# EAGLE board RasPiTimePowerSW_WithSTTS751 (EAGLE 7.7.0)
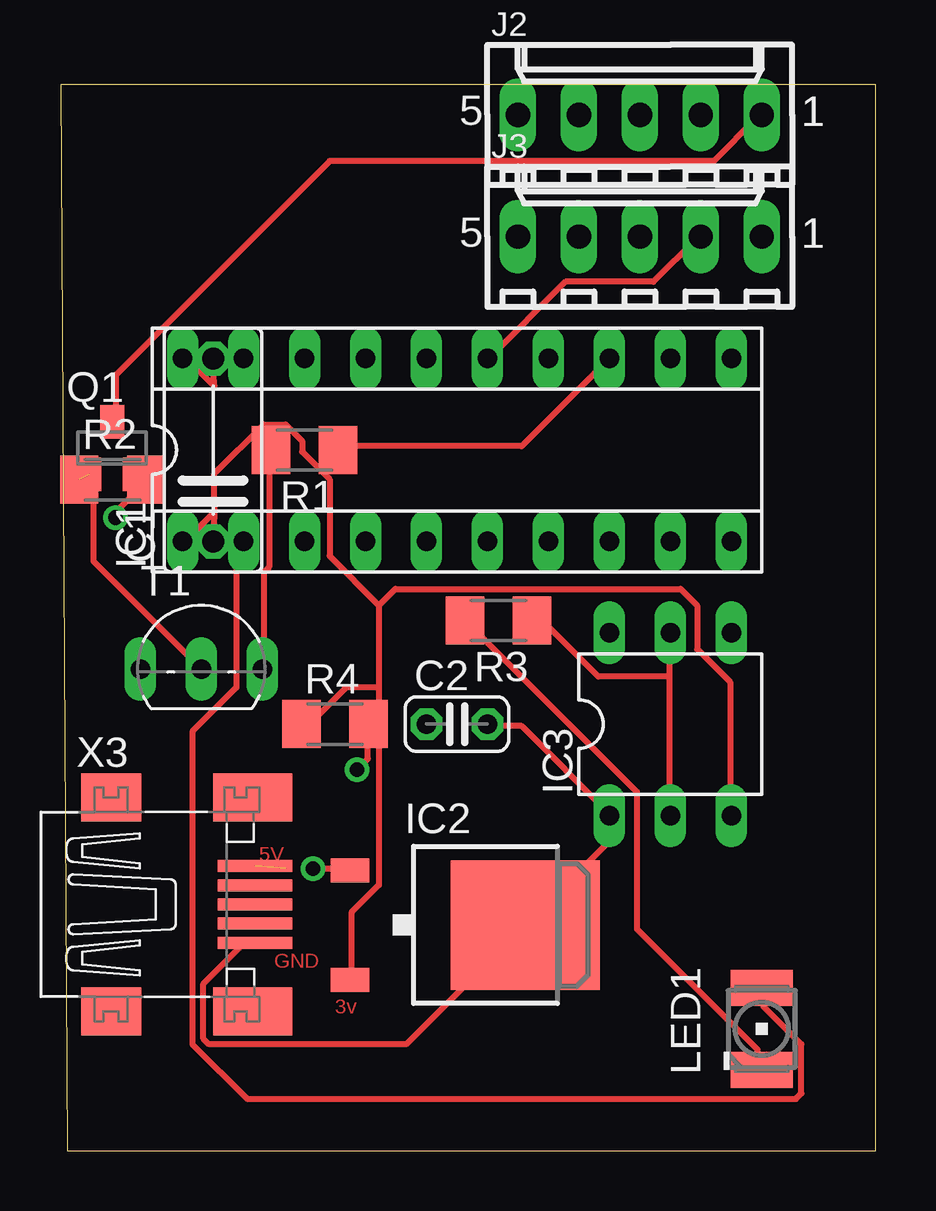
[diagram p0: board, top side]
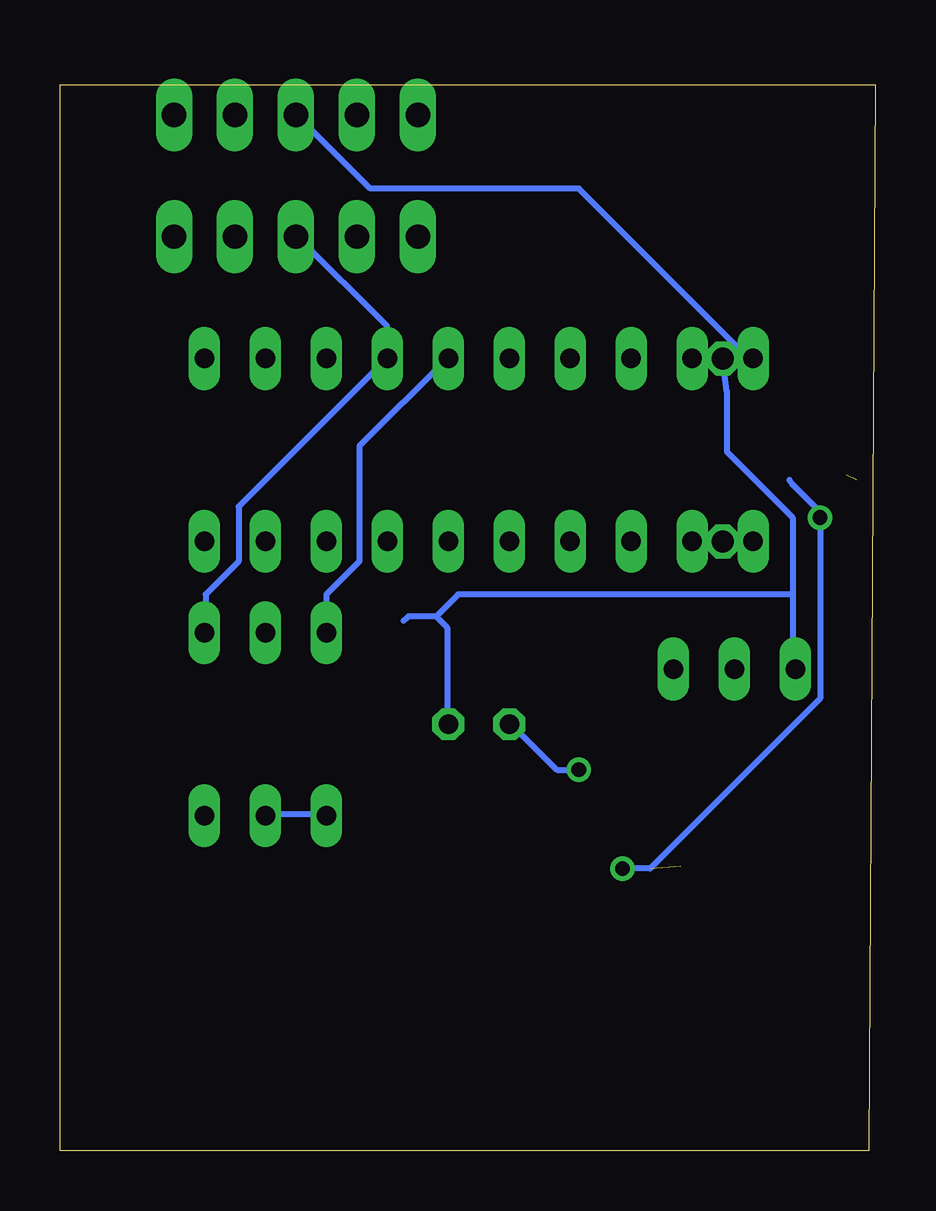
[diagram p1: board, bottom side, seen from below]

Size 33.96 x 44.44 mm. Coordinates in mm from the lower left corner, seen from the top.
Outline: 0.27,0 33.96,0 33.96,44.44 0,44.44 0.27,0
Copper layers (1*16): Top 0.035mm / dielectric 1.5mm / Bottom 0.035mm
Design rules "default": minimum track width 10mil, minimum drill 24mil, track to track 8mil, track to pad 8mil, pad to pad 8mil, via to via 8mil, smd to smd 8mil, copper to edge 40mil, drill to drill 8mil, minimum pad ring 10mil, minimum via ring 8mil, stop-mask expansion 4mil, vias tented up to drill 0mil, thermal gap 10mil

## Footprints (pad centres in the part's own frame; a part is rotated, then mirrored left to right if it is on the bottom)
C075-042X103 = drill 0.914 octagon: 1 -3.81,0; 2 3.81,0
C025-024X044 = drill 0.813 octagon: 1 -1.27,0; 2 1.27,0
SOCKET-20 = drill 0.813 long: 1 -11.43,-3.81; 2 -8.89,-3.81; 3 -6.35,-3.81; 4 -3.81,-3.81; 5 -1.27,-3.81; 6 1.27,-3.81; 7 3.81,-3.81; 8 6.35,-3.81; 9 8.89,-3.81; 10 11.43,-3.81; 11 11.43,3.81; 12 8.89,3.81; 13 6.35,3.81; 14 3.81,3.81; 15 1.27,3.81; 16 -1.27,3.81; 17 -3.81,3.81; 18 -6.35,3.81; 19 -8.89,3.81; 20 -11.43,3.81
TO252 = smd 1 x 1.6: 1 -2.28,-4.8; 2 2.28,-4.8 | smd 5.4 x 6.2: 3 0,2.5
DIL06 = drill 0.813 long: 1 -2.54,-3.81; 2 0,-3.81; 3 2.54,-3.81; 4 2.54,3.81; 5 0,3.81; 6 -2.54,3.81
6410-05 = drill 1.016 long: 1 5.08,0; 2 2.54,0; 3 0,0; 4 -2.54,0; 5 -5.08,0
PLCC2 = smd 2.6 x 1.5: A 0,1.7; C 0,-1.7
SOT23 = smd 1 x 1.4: 1 -0.95,-1.1; 2 0.95,-1.1; 3 0,1.1
M1206 = smd 1.6 x 2: 1 -1.4,0; 2 1.4,0
TO92-ECB = drill 0.813 long: B 2.54,0; C 0,0; E -2.54,0
32005-400 = smd 3.1 x 0.5: 1 3,1.6; 2 3,0.8; 3 3,0; 4 3,-0.8; 5 3,-1.6 | smd 2.5 x 2: M1 -3,-4.45; M2 -3,4.45 | smd 3.3 x 2: M3 2.9,4.45; M4 2.9,-4.45

## Placement (x,y rotation side)
C1  [C075-042X103]  6.35,29.21 90 top
C2  1nF(102)  [C025-024X044]  16.51,17.78 0 top
IC1  MSP430G2553  [SOCKET-20]  16.51,29.21 0 top
IC2  NJM2391  [TO252]  16.86,9.41 270 top
IC3  STTS751  [DIL06]  25.4,17.78 0 top
J2  22-27-2051-05  [6410-05]  24.13,43.18 0 top
J3  22-27-2051-05  [6410-05]  24.13,38.1 0 top
LED1  _T679-E1F1-1  [PLCC2]  29.21,5.08 0 top
Q1  P-ch MOS FET  [SOT23]  2.14,29.29 0 top
R1  [M1206]  10.16,29.21 180 top
R2  [M1206]  2.17,27.97 0 top
R3  [M1206]  18.24,22.1 180 top
R4  10kΩ  [M1206]  11.43,17.78 0 top
T1  2SC1815  [TO92-ECB]  5.86,20.08 0 top
X3  USB Micro  [32005-400]  5.1,10.27 0 top

## Library data of the parts
C1 C2 R4 = resistor
IC1 IC3 = ic-package
IC2 = linear
J2 J3 = con-molex; OC_FARNELL: unknown; OC_NEWARK: unknown
LED1 = led; COLOR: green
Q1 = transistor-small-signal
R1 = resistor; R: 2.2kΩ
R2 = resistor; 1K: 1kΩ
R3 = resistor; R: 200Ω
T1 = transistor
X3 = con-cypressindustries; OC_FARNELL: unknown; OC_NEWARK: unknown

## Nets
GND: C1.2 C2.2 IC1.20 IC2.3 IC3.1 IC3.2 IC3.5 J2.3 R3.1 T1.E X3.5
N$1: R1.2 T1.B
N$2: C1.1 IC1.1 IC2.2 IC3.3 R4.1
N$3: IC1.14 IC3.4 J3.3
N$4: IC1.15 IC3.6 J3.2
N$5: IC1.13 R1.1
N$6: Q1.1 R2.1 T1.C
N$8: IC1.2 LED1.A
N$9: LED1.C R3.2
N$10: C2.1 R4.2
N$11: J2.1 Q1.3
N$13: IC2.1 Q1.2 R2.2 X3.1

## Tracks (layer width: path | path; a pad name or v marks a point on that pad's centre or on a via)
GND
  Top 0.254: 25.38,19.76 25.38,14.05 IC3.2 | 25.38,19.76 25.38,21.59 IC3.5 | 25.38,19.76 22.4,19.76 20.12,22.05 19.66,22.05 R3.1 | X3.5 8,8.56 7.54,8.56 5.94,6.96 5.94,4.67 6.17,4.45 14.4,4.45 19.2,9.25 IC2.3 19.43,9.47 22.86,12.9 IC3.1 22.86,14.05 19.2,17.7 17.83,17.7 C2.2 | IC1.20 5.26,33.02 6.4,31.88 C1.2
  Bottom 0.254: IC3.1 22.86,14.05 25.38,14.05 IC3.2 | 3.43,23.19 3.43,26.39 6.17,29.13 6.17,31.65 C1.2 | 3.43,23.19 3.43,20.22 T1.E | J2.3 24,43.08 21.03,40.11 12.34,40.11 5.26,33.02 IC1.20 | 18.29,22.28 19.43,22.28 R3.1 | 18.29,22.28 17.37,23.19 3.43,23.19 | 18.29,22.28 17.83,21.82 17.83,17.93 C2.2
N$1
  Top 0.254: T1.B 8.46,20.22 8.46,24.1 8.69,24.33 8.69,29.13 R1.2
N$2
  Top 0.254: 13.26,22.73 13.26,19.3 | 13.26,19.3 13.26,11.07 12.12,9.93 12.12,7.19 IC2.2 | 13.26,22.73 11.2,24.79 11.2,27.99 10.06,29.13 10.06,29.59 9.37,30.28 8.46,30.28 6.4,28.22 6.4,26.85 C1.1 6.4,26.62 5.26,25.48 IC1.1 | 13.26,22.73 13.95,23.42 25.83,23.42 26.52,22.73 26.52,20.9 27.89,19.53 27.89,14.05 IC3.3 | 13.26,19.3 11.89,19.3 10.52,17.93 10.06,17.93 R4.1
N$3
  Bottom 0.254: 20.34,33.02 20.34,34.39 24,38.05 J3.3 | 20.34,33.02 26.52,26.85 26.52,24.56 27.89,23.19 27.89,21.59 IC3.4 | 20.34,33.02 IC1.14
N$4
  Top 0.254: IC1.15 17.83,33.02 21.03,36.22 24.69,36.22 26.52,38.05 J3.2
  Bottom 0.254: IC3.6 22.86,23.19 21.49,24.56 21.49,29.36 17.83,33.02 IC1.15
N$5
  Top 0.254: IC1.13 19.2,29.36 11.43,29.36 R1.1
N$6  (1 unrouted)
  Top 0.254: Q1.1 1.37,27.99 1.37,24.56 5.71,20.22 T1.C
N$8
  Top 0.254: LED1.A 29.26,6.73 29.26,6.04 30.86,4.45 30.86,2.39 30.63,2.16 7.77,2.16 5.49,4.45 5.49,17.47 7.32,19.3 7.32,25.02 7.54,25.25 IC1.2
N$9
  Top 0.254: LED1.C 29.03,3.53 29.03,4.22 24,9.25 24,14.96 16.92,22.05 R3.2
N$10  (via drill 0.61)
  Top 0.254: v12.34,15.88 12.8,16.33 12.8,17.7 R4.2
  Bottom 0.254: v12.34,15.88 13.26,15.88 15.09,17.7 C2.1
N$11
  Top 0.254: Q1.3 2.29,30.5 2.29,32.33 11.2,41.25 27.2,41.25 29.03,43.08 J2.1
N$13  (via drill 0.61)  (1 unrouted)
  Top 0.254: Q1.2 3.2,27.99 3.43,27.99 R2.2 3.43,27.76 2.29,26.62 v2.29,26.39 | v10.52,11.76 11.89,11.76 IC2.1
  Bottom 0.254: v10.52,11.76 9.37,11.76 2.29,18.85 v2.29,26.39 2.29,26.62 3.43,27.76 R2.2

## Text on the board
Top: 5V | GND | 3v
Document: 上から見た図